# EAGLE board SparkFun_Stepoko_Panel_v10 (EAGLE 7.3.0), part 1 of 5
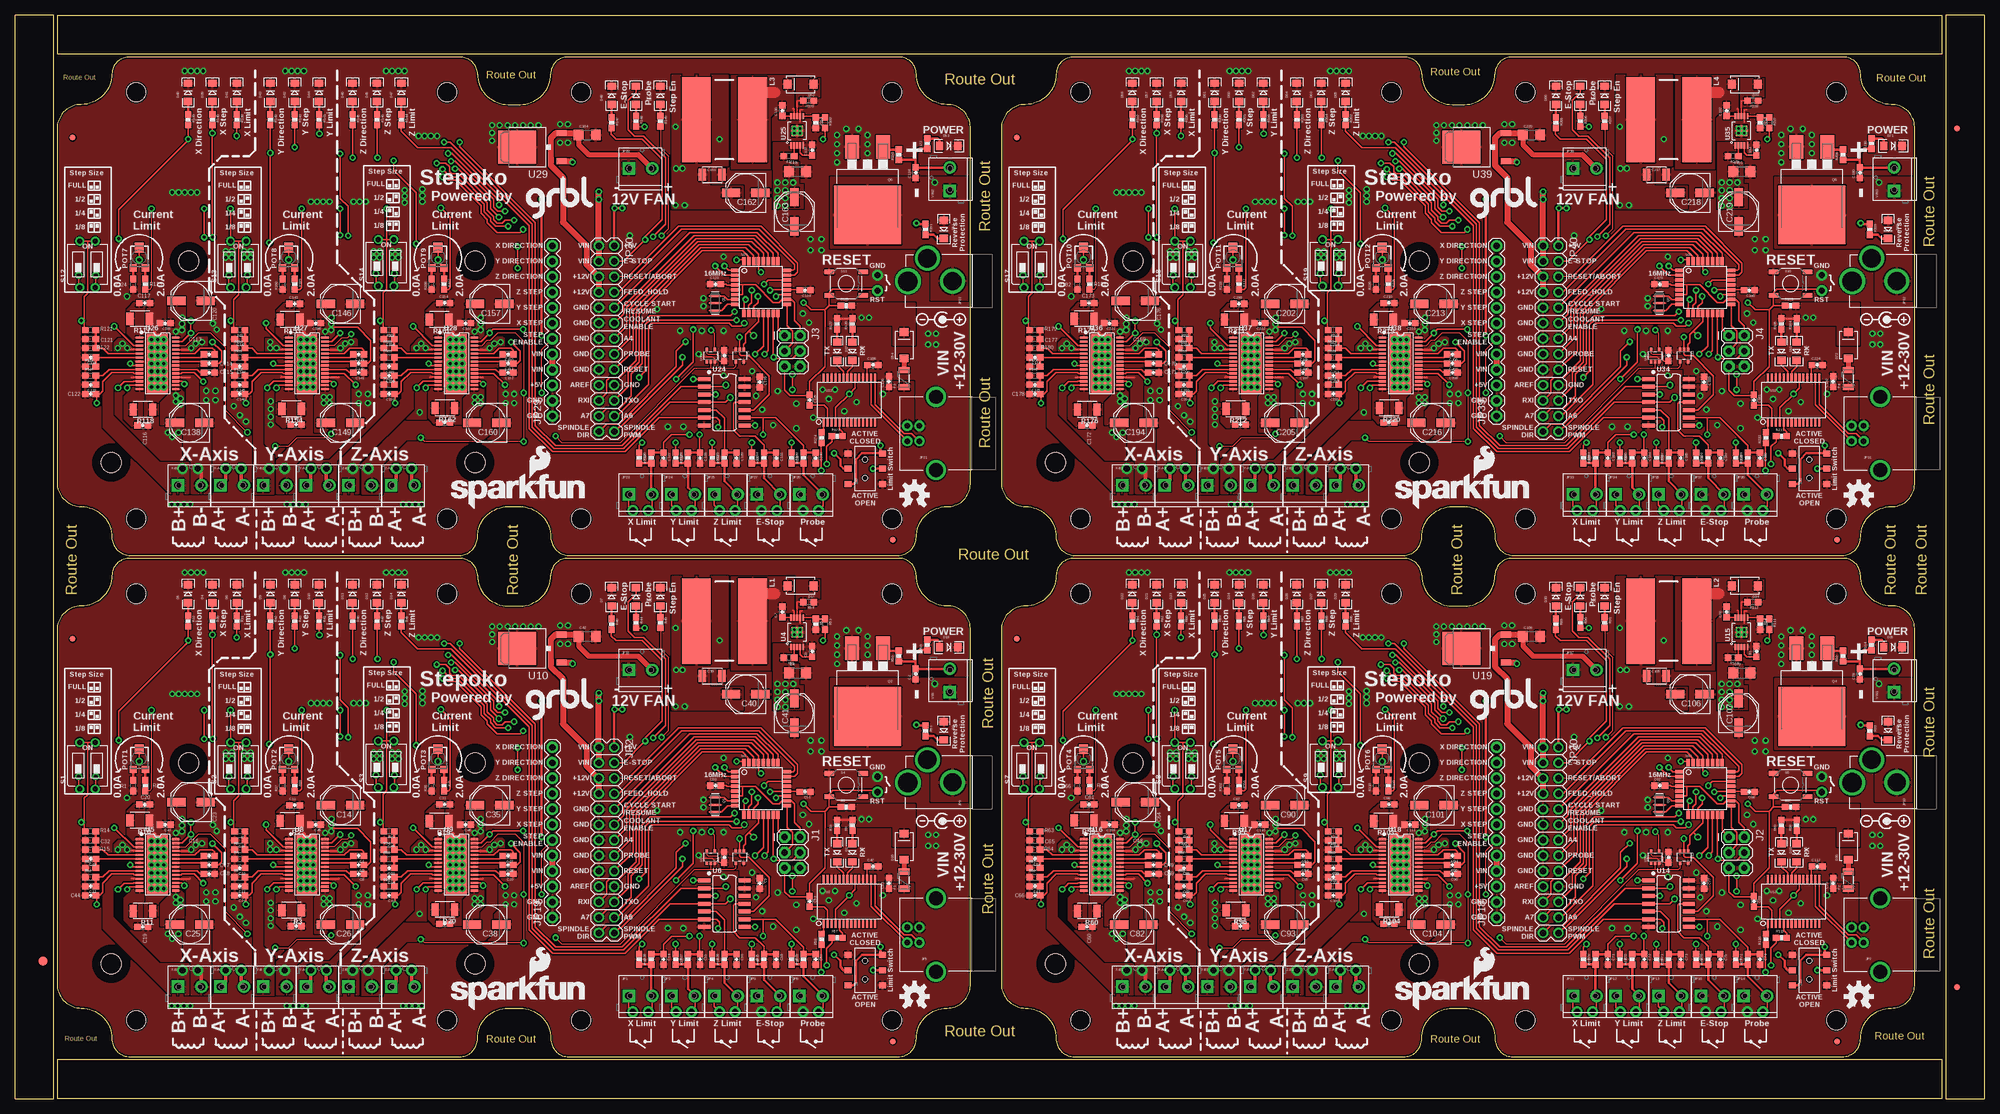
[diagram p0: board, top side]
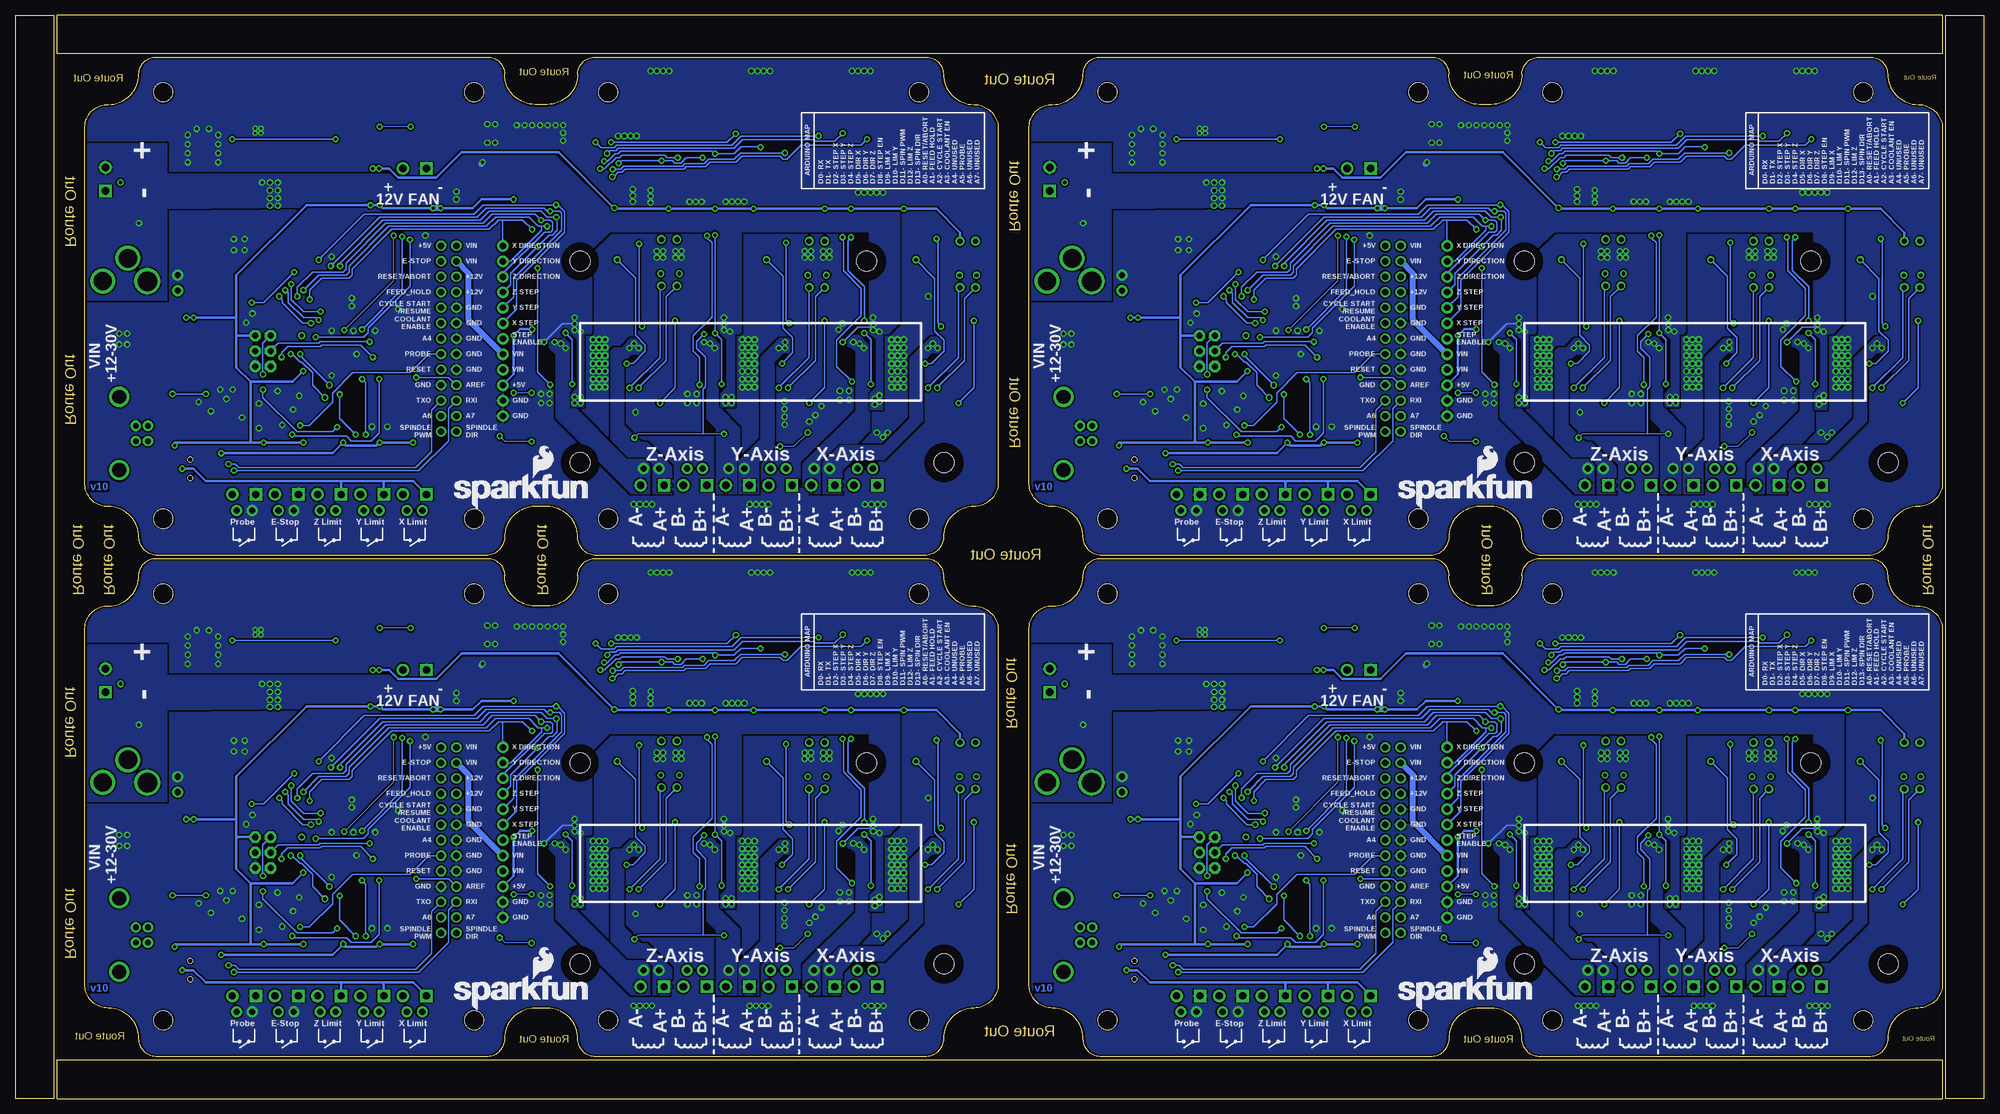
[diagram p1: board, bottom side, seen from below]

Size 323.09 x 177.8 mm. Coordinates in mm from the lower left corner, seen from the top.
Outline: 6.35,0 6.35,177.8 0,177.8 0,0 6.35,0
Outline: 6.86,6.35 6.86,0 316.23,0 316.23,6.35 6.86,6.35
Outline: 316.74,0 323.09,0 323.09,177.8 316.74,177.8 316.74,0
Outline: 316.23,171.45 316.23,177.8 6.86,177.8 6.86,171.45 316.23,171.45
Copper layers (1*16): Top 0.035mm / dielectric 1.5mm / Bottom 0.035mm
Design rules "SparkFun-2-layer": minimum track width 7mil, minimum drill 15mil, track to track 8mil, track to pad 8mil, pad to pad 8mil, via to via 8mil, smd to smd 8mil, copper to edge 8mil, drill to drill 8mil, minimum pad ring 12mil, minimum via ring 10mil, stop-mask expansion 4mil, vias tented up to drill 20mil, thermal gap 10mil
tRestrict: area 13,19.3 to 18.5,24.9; area 72.6,19.3 to 78.2,24.9; area 72.6,52.3 to 78.2,57.9; area 25.7,52.3 to 31.2,57.9; area 167.9,19.3 to 173.5,24.9; area 227.6,19.3 to 233.2,24.9; area 227.6,52.3 to 233.2,57.9; area 180.6,52.3 to 186.2,57.9; area 13,101.6 to 18.5,107.2; area 72.6,101.6 to 78.2,107.2; area 72.6,134.6 to 78.2,140.2; area 25.7,134.6 to 31.2,140.2; 4 more areas; 4 lines
bRestrict: area 25.7,52.3 to 31.2,57.9; area 72.6,19.3 to 78.2,24.9; area 13,19.3 to 18.5,24.9; area 72.8,52.5 to 78.1,57.8; area 180.6,52.3 to 186.2,57.9; area 227.6,19.3 to 233.2,24.9; area 167.9,19.3 to 173.5,24.9; area 227.7,52.5 to 233,57.8; area 25.7,134.6 to 31.2,140.2; area 72.6,101.6 to 78.2,107.2; area 13,101.6 to 18.5,107.2; area 72.8,134.7 to 78.1,140.1; 4 more areas

## Footprints (pad centres in the part's own frame; a part is rotated, then mirrored left to right if it is on the bottom)
0603-CAP = smd 1.1 x 1: 1 -0.85,0; 2 0.85,0
1206 = smd 1.6 x 1.8: 1 -1.4,0; 2 1.4,0
PANASONIC_D = smd 3 x 1.4: + 2.4,0; - -2.4,0
0603 = smd 1.1 x 1: 1 -0.85,0; 2 0.85,0
1210 = smd 1.2 x 2: 1 -1.6,0; 2 1.6,0
LED-1206 = smd 1.2 x 1.4: A -1.5,0; C 1.5,0
SMA-DIODE = smd 1.27 x 1.47: A -2.15,0; C 2.15,0
FIDUCIAL-1.5X3 = smd 1.5 x 1.5: 1 0,0
FIDUCIAL-1X2 = smd 1 x 1: 1 0,0
PTC-1206 = smd 1 x 1.8: 1 -1.4,0; 2 1.4,0
2X3 = drill 1.016 pad 1.88 octagon: 1 0,0; 2 0,2.54; 3 2.54,0; 4 2.54,2.54; 5 5.08,0; 6 5.08,2.54
SCREWTERMINAL-3.5MM-2_LOCK = drill 1.2 pad 2.032 square: 1 -0.178,0 | drill 1.2 pad 2.032: 2 3.678,0
2X13 = drill 1.016 pad 1.651: 1 0,0; 2 0,2.54; 3 2.54,0; 4 2.54,2.54; 5 5.08,0; 6 5.08,2.54; 7 7.62,0; 8 7.62,2.54; 9 10.16,0; 10 10.16,2.54; 11 12.7,0; 12 12.7,2.54; 13 15.24,0; 14 15.24,2.54; 15 17.78,0; 16 17.78,2.54; 17 20.32,0; 18 20.32,2.54; 19 22.86,0; 20 22.86,2.54; 21 25.4,0; 22 25.4,2.54; 23 27.94,0; 24 27.94,2.54; 25 30.48,0; 26 30.48,2.54
USB-B-PTH = drill 0.914 pad 1.676: D+ 0,1.25; D- 1.981,1.25; GND 0,-1.25; VBUS 1.981,-1.25 | drill 2.286: S1 -2.718,-6.02; S2 -2.718,6.02
POWER_JACK_PTH_LOCK = drill 2.997 pad 4.115: GND 0.025,6.557; GNDBREAK 3.762,10.7 | drill 3.2 pad 4.115: PWR 0,13.878
1X12 = drill 1.016 pad 1.88: 1 0,0; 2 2.54,0; 3 5.08,0; 4 7.62,0; 5 10.16,0; 6 12.7,0; 7 15.24,0; 8 17.78,0; 9 20.32,0; 10 22.86,0; 11 25.4,0; 12 27.94,0
INDUCTOR_SDR1307 = smd 14 x 4.75: P$1 0,4.6; P$2 0,-4.6
TC33X = smd 1.2 x 1.2: 1 -1,-1.825; 3 1,-1.825 | smd 1.5 x 1.6: 2 0,1.5
RESONATOR-SMD = smd 0.45 x 1.905: 1 -1.2,0; 2 0,0; 3 1.2,0
TO-263/D2PAK = smd 2.32 x 3.81: 1 -2.54,-7.045; 3 2.54,-7.045 | smd 11 x 9.65: 2 0,4.125
0603-RES = smd 1.1 x 1: 1 -0.85,0; 2 0.85,0
209-2LPST = drill 0.8: 1 -1.27,-3.81; 2 1.27,-3.81; 3 1.27,3.81; 4 -1.27,3.81
TACTILE-SWITCH-SMD = smd 1.524 x 0.762: 1 -2.794,1.905; 2 2.794,1.905; 3 -2.794,-1.905; 4 2.794,-1.905
AYZ0202 = smd 1 x 1.15: 1 -2.5,2.825; 2 0,2.825; 3 2.5,2.825; 4 -2.5,-2.825; 5 0,-2.825; 6 2.5,-2.825 | hole 0.85: 1.5,0; -1.5,0
TQFP32-08@1 = smd 1.27 x 0.559: 1 -4.293,2.8; 2 -4.293,2; 3 -4.293,1.2; 4 -4.293,0.4; 5 -4.293,-0.4; 6 -4.293,-1.2; 7 -4.293,-2; 8 -4.293,-2.8; 17 4.293,-2.8; 18 4.293,-2; 19 4.293,-1.2; 20 4.293,-0.4; 21 4.293,0.4; 22 4.293,1.2; 23 4.293,2; 24 4.293,2.8 | smd 0.559 x 1.27: 9 -2.8,-4.293; 10 -2,-4.293; 11 -1.2,-4.293; 12 -0.4,-4.293; 13 0.4,-4.293; 14 1.2,-4.293; 15 2,-4.293; 16 2.8,-4.293; 25 2.8,4.293; 26 2,4.293; 27 1.2,4.293; 28 0.4,4.293; 29 -0.4,4.293; 30 -1.2,4.293; 31 -2,4.293; 32 -2.8,4.293
SSOP28DB = smd 0.348 x 1.397: 1 -4.225,-3.656; 2 -3.575,-3.656; 3 -2.925,-3.656; 4 -2.275,-3.656; 5 -1.625,-3.656; 6 -0.975,-3.656; 7 -0.325,-3.656; 8 0.325,-3.656; 9 0.975,-3.656; 10 1.625,-3.656; 11 2.275,-3.656; 12 2.925,-3.656; 13 3.575,-3.656; 14 4.225,-3.656; 15 4.225,3.656; 16 3.575,3.656; 17 2.925,3.656; 18 2.275,3.656; 19 1.625,3.656; 20 0.975,3.656; 21 0.325,3.656; 22 -0.325,3.656; 23 -0.975,3.656; 24 -1.625,3.656; 25 -2.275,3.656; 26 -2.925,3.656; 27 -3.575,3.656; 28 -4.225,3.656
SOT353 = smd 0.42 x 0.7: 1 -0.65,-0.95; 2 0,-0.95; 3 0.65,-0.95; 4 0.65,0.95; 5 -0.65,0.95
HVSS0P-10 = smd 0.3 x 1.02: 1 -1,-2.4; 2 -0.5,-2.4; 3 0,-2.4; 4 0.5,-2.4; 5 1,-2.4; 6 1,2.4; 7 0.5,2.4; 8 0,2.4; 9 -0.5,2.4; 10 -1,2.4 | smd 1.905 x 1.727: PAD 0,0
HTSSOP28 = smd 0.36 x 1.19: 1 -4.225,-2.97; 2 -3.575,-2.97; 3 -2.925,-2.97; 4 -2.275,-2.97; 5 -1.625,-2.97; 6 -0.975,-2.97; 7 -0.325,-2.97; 8 0.325,-2.97; 9 0.975,-2.97; 10 1.625,-2.97; 11 2.275,-2.97; 12 2.925,-2.97; 13 3.575,-2.97; 14 4.225,-2.97; 15 4.225,2.97; 16 3.575,2.97; 17 2.925,2.97; 18 2.275,2.97; 19 1.625,2.97; 20 0.975,2.97; 21 0.325,2.97; 22 -0.325,2.97; 23 -0.975,2.97; 24 -1.625,2.97; 25 -2.275,2.97; 26 -2.925,2.97; 27 -3.575,2.97; 28 -4.225,2.97 | drill 0.508: GND@10 -3.9,1; GND@11 -3.9,0; GND@12 -3.9,-1; GND@13 -2.6,-1; GND@14 -2.6,0; GND@15 -2.6,1; GND@16 -1.3,1; GND@17 -1.3,0; GND@18 -1.3,-1; GND@19 0,-1; GND@20 0,0; GND@21 0,1; GND@22 1.3,1; GND@23 1.3,0; GND@24 1.3,-1; GND@25 2.6,-1; GND@26 2.6,0; GND@27 2.6,1; GND@28 3.9,1; GND@29 3.9,0; GND@30 3.9,-1 | smd 9.7 x 3.4: GND@PAD 0,0
SOIC-14 = smd 0.66 x 2.032: 1 -4.445,-3.315; 2 -3.175,-3.315; 3 -1.905,-3.315; 4 -0.635,-3.315; 5 0.635,-3.315; 6 1.905,-3.315; 7 3.175,-3.315; 8 3.175,3.315; 9 1.905,3.315; 10 0.635,3.315; 11 -0.635,3.315; 12 -1.905,3.315; 13 -3.175,3.315; 14 -4.445,3.315
TO-252 = smd 1 x 1.6: 1 -2.28,-4.8; 2 2.28,-4.8 | smd 5.4 x 6.2: 3 0,2.5
FLANGED_RED_ENCLOSURE-DIMENSION-NO-INNER-HOLES = hole 3.175: 64,6; 86,6; 137,6; 13,6; 64,76; 86,76; 137,76; 13,76
STAND-OFF = hole 3.302: 0,0

## Placement (x,y rotation side)
C1  0.22uF  [0603-CAP]  56.36,39.86 180 top
C2  0.1uF  [0603-CAP]  147.75,69.66 90 top
C3  0.1uF  [0603-CAP]  116.33,39.62 90 top
C4  1.0uF  [1206]  128.36,69.86 0 top
C5  0.1uF  [0603-CAP]  122.17,35.31 270 top
C6  0.22uF  [0603-CAP]  56.36,38.36 180 top
C7  0.1uF  [0603-CAP]  125.86,79.86 90 top
C8  0.22uF  [0603-CAP]  56.36,36.86 180 top
C9  10nF  [0603-CAP]  130.76,73.36 90 top
C10  0.1uF  [0603-CAP]  46.1,28.32 0 top
C11  0.1uF  [0603-CAP]  45.85,48.14 0 top
C12  1000pF  [0603-CAP]  36.86,37.86 180 top
C13  1000pF  [0603-CAP]  36.86,34.86 180 top
C14  47uF  [PANASONIC_D]  53.37,48.13 180 top
C15  0.18uF  [0603]  36.86,42.36 180 top
C16  0.22uF  [0603-CAP]  31.86,39.86 180 top
C17  0.22uF  [0603-CAP]  31.86,38.36 180 top
C18  0.22uF  [0603-CAP]  31.86,36.86 180 top
C19  0.1uF  [0603-CAP]  20.95,28.2 0 top
C20  0.1uF  [0603-CAP]  21.21,48.25 0 top
C21  1000pF  [0603-CAP]  12.36,39.36 180 top
C22  1000pF  [0603-CAP]  12.36,34.86 180 top
C23  47uF  [PANASONIC_D]  28.87,48.64 180 top
C24  0.1uF  [0603-CAP]  36.86,33.36 180 top
C25  47uF  [PANASONIC_D]  28.61,28.59 180 top
C26  47uF  [PANASONIC_D]  53.37,28.59 180 top
C27  0.22uF  [0603-CAP]  80.86,39.86 180 top
C28  0.22uF  [0603-CAP]  80.86,38.36 180 top
C29  0.22uF  [0603-CAP]  80.86,36.86 180 top
C30  0.1uF  [0603-CAP]  70.48,28.69 0 top
C31  0.1uF  [0603-CAP]  70.49,48.28 0 top
C32  0.18uF  [0603]  12.36,42.36 180 top
C33  1000pF  [0603-CAP]  61.36,37.86 180 top
C34  1000pF  [0603-CAP]  61.36,36.36 180 top
C35  47uF  [PANASONIC_D]  77.87,48.13 180 top
C36  0.18uF  [0603]  61.36,42.36 180 top
C37  0.1uF  [0603-CAP]  61.36,33.36 180 top
C38  47uF  [PANASONIC_D]  77.36,28.59 180 top
C39  22uF  [1210]  114.36,69.36 0 top
C40  47uF  [PANASONIC_D]  119.86,66.36 180 top
C41  47uF  [PANASONIC_D]  127.86,63.26 90 top
C42  1.0uF  [1206]  93.86,75.86 0 top
C43  0.1uF  [0603-CAP]  24.64,44.96 180 top
C44  0.1uF  [0603-CAP]  12.36,33.36 180 top
C45  0.1uF  [0603-CAP]  49.28,44.96 180 top
C46  0.1uF  [0603-CAP]  73.91,44.96 180 top
C47  0.1uF  [0603-CAP]  140.72,38.1 0 top
C48  0.22uF  [0603-CAP]  186.8,39.86 180 top
C49  0.22uF  [0603-CAP]  186.8,38.36 180 top
C50  0.1uF  [0603-CAP]  114.9,51.36 0 top
C51  0.1uF  [0603-CAP]  129.61,50.36 180 top
C52  0.1uF  [0603-CAP]  130.36,32.36 270 top
C53  0.1uF  [0603-CAP]  143.36,35.36 90 top
C54  0.1uF  [0603-CAP]  106.37,22.86 270 top
C55  0.1uF  [0603-CAP]  112.37,22.86 270 top
C56  0.1uF  [0603-CAP]  118.36,22.86 270 top
C57  0.1uF  [0603-CAP]  131.36,22.86 270 top
C58  0.1uF  [0603-CAP]  124.86,22.86 270 top
C59  0.22uF  [0603-CAP]  186.8,36.86 180 top
C60  0.1uF  [0603-CAP]  175.89,28.2 0 top
C61  0.1uF  [0603-CAP]  176.15,48.25 0 top
C62  1000pF  [0603-CAP]  167.3,39.36 180 top
C63  1000pF  [0603-CAP]  167.3,34.86 180 top
C64  47uF  [PANASONIC_D]  183.81,48.64 180 top
C65  0.18uF  [0603]  167.3,42.36 180 top
C66  0.1uF  [0603-CAP]  167.3,33.36 180 top
C67  0.1uF  [0603-CAP]  269.84,51.36 0 top
C68  0.1uF  [0603-CAP]  284.55,50.36 180 top
C69  0.1uF  [0603-CAP]  285.3,32.36 270 top
C70  0.1uF  [0603-CAP]  298.3,35.36 90 top
C71  0.1uF  [0603-CAP]  261.31,22.86 270 top
C72  0.1uF  [0603-CAP]  267.31,22.86 270 top
C73  0.1uF  [0603-CAP]  273.3,22.86 270 top
C74  0.1uF  [0603-CAP]  286.3,22.86 270 top
C75  0.1uF  [0603-CAP]  279.8,22.86 270 top
C76  0.1uF  [0603-CAP]  271.27,39.62 90 top
C77  0.1uF  [0603-CAP]  277.11,35.31 270 top
C78  0.1uF  [0603-CAP]  302.69,69.66 90 top
C79  1.0uF  [1206]  283.3,69.86 0 top
C80  0.1uF  [0603-CAP]  280.8,79.86 90 top
C81  10nF  [0603-CAP]  285.7,73.36 90 top
C82  47uF  [PANASONIC_D]  183.55,28.59 180 top
C83  0.22uF  [0603-CAP]  211.3,39.86 180 top
C84  0.22uF  [0603-CAP]  211.3,38.36 180 top
C85  0.22uF  [0603-CAP]  211.3,36.86 180 top
C86  0.1uF  [0603-CAP]  201.04,28.32 0 top
C87  0.1uF  [0603-CAP]  200.79,48.14 0 top
C88  1000pF  [0603-CAP]  191.8,37.86 180 top
C89  1000pF  [0603-CAP]  191.8,34.86 180 top
C90  47uF  [PANASONIC_D]  208.31,48.13 180 top
C91  0.18uF  [0603]  191.8,42.36 180 top
C92  0.1uF  [0603-CAP]  191.8,33.36 180 top
C93  47uF  [PANASONIC_D]  208.31,28.59 180 top
C94  0.22uF  [0603-CAP]  235.8,39.86 180 top
C95  0.22uF  [0603-CAP]  235.8,38.36 180 top
C96  0.22uF  [0603-CAP]  235.8,36.86 180 top
C97  0.1uF  [0603-CAP]  225.42,28.69 0 top
C98  0.1uF  [0603-CAP]  225.43,48.28 0 top
C99  1000pF  [0603-CAP]  216.3,37.86 180 top
C100  1000pF  [0603-CAP]  216.3,36.36 180 top
C101  47uF  [PANASONIC_D]  232.81,48.13 180 top
C102  0.18uF  [0603]  216.3,42.36 180 top
C103  0.1uF  [0603-CAP]  216.3,33.36 180 top
C104  47uF  [PANASONIC_D]  232.3,28.59 180 top
C105  22uF  [1210]  269.3,69.36 0 top
C106  47uF  [PANASONIC_D]  274.8,66.36 180 top
C107  47uF  [PANASONIC_D]  282.8,63.26 90 top
C108  1.0uF  [1206]  248.8,75.86 0 top
C109  0.1uF  [0603-CAP]  179.58,44.96 180 top
C110  0.1uF  [0603-CAP]  204.22,44.96 180 top
C111  0.1uF  [0603-CAP]  228.85,44.96 180 top
C112  0.1uF  [0603-CAP]  295.66,38.1 0 top
C113  0.22uF  [0603-CAP]  31.86,122.15 180 top
C114  0.22uF  [0603-CAP]  31.86,120.65 180 top
C115  0.22uF  [0603-CAP]  31.86,119.15 180 top
C116  0.1uF  [0603-CAP]  20.95,110.5 0 top
C117  0.1uF  [0603-CAP]  21.21,130.55 0 top
C118  1000pF  [0603-CAP]  12.36,121.65 180 top
C119  1000pF  [0603-CAP]  12.36,117.15 180 top
C120  47uF  [PANASONIC_D]  28.87,130.93 180 top
C121  0.18uF  [0603]  12.36,124.65 180 top
C122  0.1uF  [0603-CAP]  12.36,115.65 180 top
C123  0.1uF  [0603-CAP]  114.9,133.66 0 top
C124  0.1uF  [0603-CAP]  129.61,132.65 180 top
C125  0.1uF  [0603-CAP]  130.36,114.65 270 top
C126  0.1uF  [0603-CAP]  143.36,117.65 90 top
C127  0.1uF  [0603-CAP]  106.37,105.15 270 top
C128  0.1uF  [0603-CAP]  112.37,105.15 270 top
C129  0.1uF  [0603-CAP]  118.36,105.15 270 top
C130  0.1uF  [0603-CAP]  131.36,105.15 270 top
C131  0.1uF  [0603-CAP]  124.86,105.15 270 top
C132  0.1uF  [0603-CAP]  116.33,121.92 90 top
C133  0.1uF  [0603-CAP]  122.17,117.6 270 top
C134  0.1uF  [0603-CAP]  147.75,151.95 90 top
C135  1.0uF  [1206]  128.36,152.15 0 top
C136  0.1uF  [0603-CAP]  125.86,162.15 90 top
C137  10nF  [0603-CAP]  130.76,155.65 90 top
C138  47uF  [PANASONIC_D]  28.61,110.88 180 top
C139  0.22uF  [0603-CAP]  56.36,122.15 180 top
C140  0.22uF  [0603-CAP]  56.36,120.65 180 top
C141  0.22uF  [0603-CAP]  56.36,119.15 180 top
C142  0.1uF  [0603-CAP]  46.1,110.61 0 top
C143  0.1uF  [0603-CAP]  45.85,130.43 0 top
C144  1000pF  [0603-CAP]  36.86,120.15 180 top
C145  1000pF  [0603-CAP]  36.86,117.15 180 top
C146  47uF  [PANASONIC_D]  53.37,130.42 180 top
C147  0.18uF  [0603]  36.86,124.65 180 top
C148  0.1uF  [0603-CAP]  36.86,115.65 180 top
C149  47uF  [PANASONIC_D]  53.37,110.88 180 top
C150  0.22uF  [0603-CAP]  80.86,122.15 180 top
C151  0.22uF  [0603-CAP]  80.86,120.65 180 top
C152  0.22uF  [0603-CAP]  80.86,119.15 180 top
C153  0.1uF  [0603-CAP]  70.48,110.98 0 top
C154  0.1uF  [0603-CAP]  70.49,130.57 0 top
C155  1000pF  [0603-CAP]  61.36,120.15 180 top
C156  1000pF  [0603-CAP]  61.36,118.65 180 top
C157  47uF  [PANASONIC_D]  77.87,130.42 180 top
C158  0.18uF  [0603]  61.36,124.65 180 top
C159  0.1uF  [0603-CAP]  61.36,115.65 180 top
C160  47uF  [PANASONIC_D]  77.36,110.88 180 top
C161  22uF  [1210]  114.36,151.65 0 top
C162  47uF  [PANASONIC_D]  119.86,148.65 180 top
C163  47uF  [PANASONIC_D]  127.86,145.55 90 top
C164  1.0uF  [1206]  93.86,158.15 0 top
C165  0.1uF  [0603-CAP]  24.64,127.25 180 top
C166  0.1uF  [0603-CAP]  49.28,127.25 180 top
C167  0.1uF  [0603-CAP]  73.91,127.25 180 top
C168  0.1uF  [0603-CAP]  140.72,120.4 0 top
C169  0.22uF  [0603-CAP]  186.8,122.15 180 top
C170  0.22uF  [0603-CAP]  186.8,120.65 180 top
C171  0.22uF  [0603-CAP]  186.8,119.15 180 top
C172  0.1uF  [0603-CAP]  175.89,110.5 0 top
C173  0.1uF  [0603-CAP]  176.15,130.55 0 top
C174  1000pF  [0603-CAP]  167.3,121.65 180 top
C175  1000pF  [0603-CAP]  167.3,117.15 180 top
C176  47uF  [PANASONIC_D]  183.81,130.93 180 top
C177  0.18uF  [0603]  167.3,124.65 180 top
C178  0.1uF  [0603-CAP]  167.3,115.65 180 top
C179  0.1uF  [0603-CAP]  269.84,133.66 0 top
C180  0.1uF  [0603-CAP]  284.55,132.65 180 top
C181  0.1uF  [0603-CAP]  285.3,114.65 270 top
C182  0.1uF  [0603-CAP]  298.3,117.65 90 top
C183  0.1uF  [0603-CAP]  261.31,105.15 270 top
C184  0.1uF  [0603-CAP]  267.31,105.15 270 top
C185  0.1uF  [0603-CAP]  273.3,105.15 270 top
C186  0.1uF  [0603-CAP]  286.3,105.15 270 top
C187  0.1uF  [0603-CAP]  279.8,105.15 270 top
C188  0.1uF  [0603-CAP]  271.27,121.92 90 top
C189  0.1uF  [0603-CAP]  277.11,117.6 270 top
C190  0.1uF  [0603-CAP]  302.69,151.95 90 top
C191  1.0uF  [1206]  283.3,152.15 0 top
C192  0.1uF  [0603-CAP]  280.8,162.15 90 top
C193  10nF  [0603-CAP]  285.7,155.65 90 top
C194  47uF  [PANASONIC_D]  183.55,110.88 180 top
C195  0.22uF  [0603-CAP]  211.3,122.15 180 top
C196  0.22uF  [0603-CAP]  211.3,120.65 180 top
C197  0.22uF  [0603-CAP]  211.3,119.15 180 top
C198  0.1uF  [0603-CAP]  201.04,110.61 0 top
C199  0.1uF  [0603-CAP]  200.79,130.43 0 top
C200  1000pF  [0603-CAP]  191.8,120.15 180 top
C201  1000pF  [0603-CAP]  191.8,117.15 180 top
C202  47uF  [PANASONIC_D]  208.31,130.42 180 top
C203  0.18uF  [0603]  191.8,124.65 180 top
C204  0.1uF  [0603-CAP]  191.8,115.65 180 top
C205  47uF  [PANASONIC_D]  208.31,110.88 180 top
C206  0.22uF  [0603-CAP]  235.8,122.15 180 top
C207  0.22uF  [0603-CAP]  235.8,120.65 180 top
C208  0.22uF  [0603-CAP]  235.8,119.15 180 top
C209  0.1uF  [0603-CAP]  225.42,110.98 0 top
C210  0.1uF  [0603-CAP]  225.43,130.57 0 top
C211  1000pF  [0603-CAP]  216.3,120.15 180 top
C212  1000pF  [0603-CAP]  216.3,118.65 180 top
C213  47uF  [PANASONIC_D]  232.81,130.42 180 top
C214  0.18uF  [0603]  216.3,124.65 180 top
C215  0.1uF  [0603-CAP]  216.3,115.65 180 top
C216  47uF  [PANASONIC_D]  232.3,110.88 180 top
C217  22uF  [1210]  269.3,151.65 0 top
C218  47uF  [PANASONIC_D]  274.8,148.65 180 top
C219  47uF  [PANASONIC_D]  282.8,145.55 90 top
C220  1.0uF  [1206]  248.8,158.15 0 top
C221  0.1uF  [0603-CAP]  179.58,127.25 180 top
C222  0.1uF  [0603-CAP]  204.22,127.25 180 top
C223  0.1uF  [0603-CAP]  228.85,127.25 180 top
C224  0.1uF  [0603-CAP]  295.66,120.4 0 top
D1  RED  [LED-1206]  134.86,40.36 270 top
D2  GREEN  [LED-1206]  137.36,40.36 270 top
D3  RED  [LED-1206]  152.36,60.36 270 top
D4  GREEN  [LED-1206]  32.36,82.86 90 top
D5  RED  [LED-1206]  28.36,82.86 90 top
D6  Yellow  [LED-1206]  36.36,82.86 90 top
D7  RED  [LED-1206]  97.86,82.36 90 top
D8  GREEN  [LED-1206]  45.86,82.86 90 top
D9  RED  [LED-1206]  41.86,82.86 90 top
D10  Yellow  [LED-1206]  49.86,82.86 90 top
D11  BLUE  [LED-1206]  101.86,82.36 90 top
D12  GREEN  [LED-1206]  59.36,82.86 90 top
D13  RED  [LED-1206]  55.36,82.86 90 top
D14  Yellow  [LED-1206]  63.36,82.86 90 top
D15  GREEN  [LED-1206]  105.86,82.36 90 top
D16  MBRA140  [SMA-DIODE]  145.86,41.36 90 top
D17  MBRA140  [SMA-DIODE]  128.86,84.17 180 top
D18  BLUE  [LED-1206]  153.16,74.06 0 top
D19  RED  [LED-1206]  289.8,40.36 270 top
D20  GREEN  [LED-1206]  292.3,40.36 270 top
D21  GREEN  [LED-1206]  187.3,82.86 90 top
D22  RED  [LED-1206]  183.3,82.86 90 top
D23  Yellow  [LED-1206]  191.3,82.86 90 top
D24  GREEN  [LED-1206]  200.8,82.86 90 top
D25  RED  [LED-1206]  196.8,82.86 90 top
D26  Yellow  [LED-1206]  204.8,82.86 90 top
D27  GREEN  [LED-1206]  214.3,82.86 90 top
D28  RED  [LED-1206]  210.3,82.86 90 top
D29  Yellow  [LED-1206]  218.3,82.86 90 top
D30  RED  [LED-1206]  252.8,82.36 90 top
D31  BLUE  [LED-1206]  256.8,82.36 90 top
D32  GREEN  [LED-1206]  260.8,82.36 90 top
D33  RED  [LED-1206]  307.3,60.36 270 top
D34  MBRA140  [SMA-DIODE]  283.8,84.17 180 top
D35  BLUE  [LED-1206]  308.1,74.06 0 top
D36  MBRA140  [SMA-DIODE]  300.8,41.36 90 top
D37  RED  [LED-1206]  134.86,122.65 270 top
D38  GREEN  [LED-1206]  137.36,122.65 270 top
D39  GREEN  [LED-1206]  32.36,165.15 90 top
D40  RED  [LED-1206]  28.36,165.15 90 top
D41  Yellow  [LED-1206]  36.36,165.15 90 top
D42  GREEN  [LED-1206]  45.86,165.15 90 top
D43  RED  [LED-1206]  41.86,165.15 90 top
D44  Yellow  [LED-1206]  49.86,165.15 90 top
D45  GREEN  [LED-1206]  59.36,165.15 90 top
D46  RED  [LED-1206]  55.36,165.15 90 top
D47  Yellow  [LED-1206]  63.36,165.15 90 top
D48  RED  [LED-1206]  97.86,164.65 90 top
D49  BLUE  [LED-1206]  101.86,164.65 90 top
D50  GREEN  [LED-1206]  105.86,164.65 90 top
D51  RED  [LED-1206]  152.36,142.65 270 top
D52  MBRA140  [SMA-DIODE]  128.86,166.46 180 top
D53  BLUE  [LED-1206]  153.16,156.35 0 top
D54  MBRA140  [SMA-DIODE]  145.86,123.65 90 top
D55  RED  [LED-1206]  289.8,122.65 270 top
D56  GREEN  [LED-1206]  292.3,122.65 270 top
D57  GREEN  [LED-1206]  187.3,165.15 90 top
D58  RED  [LED-1206]  183.3,165.15 90 top
D59  Yellow  [LED-1206]  191.3,165.15 90 top
D60  GREEN  [LED-1206]  200.8,165.15 90 top
D61  RED  [LED-1206]  196.8,165.15 90 top
D62  Yellow  [LED-1206]  204.8,165.15 90 top
D63  GREEN  [LED-1206]  214.3,165.15 90 top
D64  RED  [LED-1206]  210.3,165.15 90 top
D65  Yellow  [LED-1206]  218.3,165.15 90 top
D66  RED  [LED-1206]  252.8,164.65 90 top
D67  BLUE  [LED-1206]  256.8,164.65 90 top
D68  GREEN  [LED-1206]  260.8,164.65 90 top
D69  RED  [LED-1206]  307.3,142.65 270 top
D70  MBRA140  [SMA-DIODE]  283.8,166.46 180 top
D71  BLUE  [LED-1206]  308.1,156.35 0 top
D72  MBRA140  [SMA-DIODE]  300.8,123.65 90 top
E$1  [FIDUCIAL-1.5X3]  4.57,22.61 0 top
E$4  [FIDUCIAL-1X2]  318.64,18.29 0 top
E$5  [FIDUCIAL-1X2]  318.64,159.26 180 top
F1  PTCSMD  [PTC-1206]  145.86,35.86 90 top
F2  PTCSMD  [PTC-1206]  300.8,35.86 90 top
F3  PTCSMD  [PTC-1206]  145.86,118.15 90 top
F4  PTCSMD  [PTC-1206]  300.8,118.15 90 top
FID1  FIDUCIAL1X2  [FIDUCIAL-1X2]  9.4,75.44 0 top
FID2  FIDUCIAL1X2  [FIDUCIAL-1X2]  144.02,9.4 0 top
FID3  FIDUCIAL1X2  [FIDUCIAL-1X2]  164.34,75.44 0 top
FID4  FIDUCIAL1X2  [FIDUCIAL-1X2]  298.96,9.4 0 top
FID5  FIDUCIAL1X2  [FIDUCIAL-1X2]  9.4,157.73 0 top
FID6  FIDUCIAL1X2  [FIDUCIAL-1X2]  144.02,91.69 0 top
FID7  FIDUCIAL1X2  [FIDUCIAL-1X2]  164.34,157.73 0 top
FID8  FIDUCIAL1X2  [FIDUCIAL-1X2]  298.96,91.69 0 top
J1  AVR ISP  [2X3]  126.24,42.93 270 top
J2  AVR ISP  [2X3]  281.18,42.93 270 top
J3  AVR ISP  [2X3]  126.24,125.22 270 top
J4  AVR ISP  [2X3]  281.18,125.22 270 top
JP1  3.5mm  [SCREWTERMINAL-3.5MM-2_LOCK]  100.86,16.86 0 top
JP2  [2X13]  95.76,57.66 270 top
JP3  3.5mm  [SCREWTERMINAL-3.5MM-2_LOCK]  107.86,16.86 0 top
JP4  3.5mm  [SCREWTERMINAL-3.5MM-2_LOCK]  114.86,16.86 0 top
JP5  USB-B  [USB-B-PTH]  148.36,26.86 180 top
JP6  POWER  [POWER_JACK_PTH_LOCK]  160.36,51.86 90 top
JP7  USB-B  [USB-B-PTH]  303.3,26.86 180 top
JP8  3.5mm  [SCREWTERMINAL-3.5MM-2_LOCK]  128.86,16.86 0 top
JP9  3.5mm  [SCREWTERMINAL-3.5MM-2_LOCK]  121.86,16.86 0 top
JP10  POWER  [POWER_JACK_PTH_LOCK]  315.3,51.86 90 top
JP11  3.5mm  [SCREWTERMINAL-3.5MM-2_LOCK]  255.8,16.86 0 top
JP12  3.5mm  [SCREWTERMINAL-3.5MM-2_LOCK]  262.8,16.86 0 top
JP13  3.5mm  [SCREWTERMINAL-3.5MM-2_LOCK]  269.8,16.86 0 top
JP14  3.5mm  [SCREWTERMINAL-3.5MM-2_LOCK]  283.8,16.86 0 top
JP15  3.5mm  [SCREWTERMINAL-3.5MM-2_LOCK]  100.84,70.36 0 top
JP16  3.5mm  [SCREWTERMINAL-3.5MM-2_LOCK]  276.8,16.86 0 top
JP17  3.5mm  [SCREWTERMINAL-3.5MM-2_LOCK]  255.78,70.36 0 top
JP18  [1X12]  243.08,29.72 90 top
JP19  [1X12]  88.14,29.72 90 top
JP20  [2X13]  250.7,57.66 270 top
JP21  USB-B  [USB-B-PTH]  148.36,109.15 180 top
JP22  POWER  [POWER_JACK_PTH_LOCK]  160.36,134.15 90 top
JP23  3.5mm  [SCREWTERMINAL-3.5MM-2_LOCK]  100.86,99.15 0 top
JP24  3.5mm  [SCREWTERMINAL-3.5MM-2_LOCK]  107.86,99.15 0 top
JP25  3.5mm  [SCREWTERMINAL-3.5MM-2_LOCK]  114.86,99.15 0 top
JP26  3.5mm  [SCREWTERMINAL-3.5MM-2_LOCK]  128.86,99.15 0 top
JP27  3.5mm  [SCREWTERMINAL-3.5MM-2_LOCK]  121.86,99.15 0 top
JP28  3.5mm  [SCREWTERMINAL-3.5MM-2_LOCK]  100.84,152.65 0 top
JP29  [1X12]  88.14,112.01 90 top
JP30  [2X13]  95.76,139.95 270 top
JP31  USB-B  [USB-B-PTH]  303.3,109.15 180 top
JP32  POWER  [POWER_JACK_PTH_LOCK]  315.3,134.15 90 top
JP33  3.5mm  [SCREWTERMINAL-3.5MM-2_LOCK]  255.8,99.15 0 top
JP34  3.5mm  [SCREWTERMINAL-3.5MM-2_LOCK]  262.8,99.15 0 top
JP35  3.5mm  [SCREWTERMINAL-3.5MM-2_LOCK]  269.8,99.15 0 top
JP36  3.5mm  [SCREWTERMINAL-3.5MM-2_LOCK]  283.8,99.15 0 top
JP37  3.5mm  [SCREWTERMINAL-3.5MM-2_LOCK]  276.8,99.15 0 top
JP38  3.5mm  [SCREWTERMINAL-3.5MM-2_LOCK]  255.78,152.65 0 top
JP39  [1X12]  243.08,112.01 90 top
JP40  [2X13]  250.7,139.95 270 top
L1  27uH  [INDUCTOR_SDR1307]  116.36,78.36 270 top
L2  27uH  [INDUCTOR_SDR1307]  271.3,78.36 270 top
L3  27uH  [INDUCTOR_SDR1307]  116.36,160.65 270 top
L4  27uH  [INDUCTOR_SDR1307]  271.3,160.65 270 top
LOGO1  OSHW-LOGOM  [OSHW-LOGO-M]  147.57,16.76 0 top
LOGO2  SFE_LOGO_NAME_FLAME.2_INCH  [SFE_LOGO_NAME_FLAME_.2@1]  70.87,14.48 0 top
LOGO3  SFE_LOGO_NAME_FLAME.2_INCH  [SFE_LOGO_NAME_FLAME_.2]  96.77,14.48 0 bottom
LOGO4  OSHW-LOGOM  [OSHW-LOGO-M]  302.51,16.76 0 top
LOGO5  SFE_LOGO_NAME_FLAME.2_INCH  [SFE_LOGO_NAME_FLAME_.2@1]  225.81,14.48 0 top
LOGO6  SFE_LOGO_NAME_FLAME.2_INCH  [SFE_LOGO_NAME_FLAME_.2]  251.71,14.48 0 bottom
LOGO7  OSHW-LOGOM  [OSHW-LOGO-M]  147.57,99.06 0 top
LOGO8  SFE_LOGO_NAME_FLAME.2_INCH  [SFE_LOGO_NAME_FLAME_.2@1]  70.87,96.77 0 top
LOGO9  SFE_LOGO_NAME_FLAME.2_INCH  [SFE_LOGO_NAME_FLAME_.2]  96.77,96.77 0 bottom
LOGO10  OSHW-LOGOM  [OSHW-LOGO-M]  302.51,99.06 0 top
LOGO11  SFE_LOGO_NAME_FLAME.2_INCH  [SFE_LOGO_NAME_FLAME_.2@1]  225.81,96.77 0 top
LOGO12  SFE_LOGO_NAME_FLAME.2_INCH  [SFE_LOGO_NAME_FLAME_.2]  251.71,96.77 0 bottom
POT1  2K_LINEAR_POT_SMD  [TC33X]  20.36,55.86 0 top
POT2  2K_LINEAR_POT_SMD  [TC33X]  44.86,55.86 0 top
POT3  2K_LINEAR_POT_SMD  [TC33X]  69.36,55.86 0 top
POT4  2K_LINEAR_POT_SMD  [TC33X]  175.3,55.86 0 top
POT5  2K_LINEAR_POT_SMD  [TC33X]  199.8,55.86 0 top
POT6  2K_LINEAR_POT_SMD  [TC33X]  224.3,55.86 0 top
POT7  2K_LINEAR_POT_SMD  [TC33X]  20.36,138.15 0 top
POT8  2K_LINEAR_POT_SMD  [TC33X]  44.86,138.15 0 top
POT9  2K_LINEAR_POT_SMD  [TC33X]  69.36,138.15 0 top
POT10  2K_LINEAR_POT_SMD  [TC33X]  175.3,138.15 0 top
POT11  2K_LINEAR_POT_SMD  [TC33X]  199.8,138.15 0 top
POT12  2K_LINEAR_POT_SMD  [TC33X]  224.3,138.15 0 top
Q1  16MHZ  [RESONATOR-SMD]  114.86,48.23 270 top
Q2  100A/100V  [TO-263/D2PAK]  139.86,66.86 180 top
Q3  16MHZ  [RESONATOR-SMD]  269.8,48.23 270 top
Q4  100A/100V  [TO-263/D2PAK]  294.8,66.86 180 top
Q5  16MHZ  [RESONATOR-SMD]  114.86,130.53 270 top
Q6  100A/100V  [TO-263/D2PAK]  139.86,149.15 180 top
Q7  16MHZ  [RESONATOR-SMD]  269.8,130.53 270 top
Q8  100A/100V  [TO-263/D2PAK]  294.8,149.15 180 top
R1  0  [0603]  19.36,51.36 90 top
R2  0.1  [1210]  45.09,45.56 180 top
R3  0.1  [1210]  45.34,30.9 180 top
R4  39K  [0603]  36.86,39.36 0 top
R5  39K  [0603]  36.86,36.36 0 top
R6  10K  [0603-RES]  136.36,47.86 0 top
R7  5.6K  [0603]  36.86,43.86 180 top
R8  5.6K  [0603]  36.86,40.86 0 top
R9  1K  [0603-RES]  137.36,44.86 90 top
R10  0.1  [1210]  20.45,45.67 180 top
R11  0.1  [1210]  20.96,30.78 180 top
R12  39K  [0603]  12.36,37.86 0 top
R13  39K  [0603]  12.36,36.36 0 top
R14  5.6K  [0603]  12.36,43.86 180 top
R15  5.6K  [0603]  12.36,40.86 0 top
R16  3.3K  [0603-RES]  45.86,51.36 270 top
R17  0  [0603]  43.86,51.36 90 top
R18  1K  [0603-RES]  134.86,44.86 90 top
R19  0.1  [1210]  69.57,45.54 180 top
R20  0.1  [1210]  70.49,31.01 180 top
R21  39K  [0603]  61.36,39.36 0 top
R22  39K  [0603]  61.36,34.86 0 top
R23  5.6K  [0603]  61.36,43.86 180 top
R24  5.6K  [0603]  61.36,40.86 0 top
R25  3.3K  [0603-RES]  70.36,51.36 270 top
R26  0  [0603]  68.36,51.36 90 top
R27  10K  [0603-RES]  108.37,22.86 270 top
R28  10K  [0603-RES]  114.36,22.86 270 top
R29  10K  [0603-RES]  127.36,22.86 270 top
R30  1K  [0603-RES]  104.37,22.86 90 top
R31  1K  [0603-RES]  36.36,78.36 270 top
R32  1K  [0603-RES]  28.36,78.36 270 top
R33  1K  [0603-RES]  110.37,22.86 90 top
R34  1K  [0603-RES]  116.36,22.86 90 top
R35  10K  [0603-RES]  120.86,22.86 270 top
R36  1K  [0603-RES]  129.36,22.86 90 top
R37  3.3K  [0603-RES]  21.36,51.36 270 top
R38  10K  [0603-RES]  102.37,22.86 270 top
R39  1K  [0603-RES]  32.36,78.36 270 top
R40  1K  [0603-RES]  97.86,77.86 270 top
R41  1K  [0603-RES]  49.86,78.36 270 top
R42  1K  [0603-RES]  41.86,78.36 270 top
R43  1K  [0603-RES]  45.86,78.36 270 top
R44  1K  [0603-RES]  101.86,78.11 270 top
R45  1K  [0603-RES]  63.36,78.36 270 top
R46  1K  [0603-RES]  55.36,78.36 270 top
R47  1K  [0603-RES]  59.36,78.36 270 top
R48  1K  [0603-RES]  122.86,22.86 90 top
R49  1K  [0603-RES]  105.86,78.11 270 top
R50  1K  [0603-RES]  144.98,72.63 90 top
R51  10K  [0603-RES]  149.36,60.36 270 top
R52  10K  [0603-RES]  131.36,77.86 270 top
R53  9.76K  [0603]  132.86,77.86 270 top
R54  50.0m  [0603]  130.16,81.47 180 top
R55  348K  [0603]  126.96,72.36 180 top
R56  10K  [0603-RES]  149.66,74.46 90 top
R57  1K  [0603-RES]  134.87,26.42 0 top
R58  1K  [0603-RES]  132.33,26.16 90 top
R59  0.1  [1210]  175.39,45.67 180 top
R60  0.1  [1210]  175.9,30.78 180 top
R61  39K  [0603]  167.3,37.86 0 top
R62  39K  [0603]  167.3,36.36 0 top
R63  5.6K  [0603]  167.3,43.86 180 top
R64  5.6K  [0603]  167.3,40.86 0 top
R65  3.3K  [0603-RES]  176.3,51.36 270 top
R66  0  [0603]  174.3,51.36 90 top
R67  10K  [0603-RES]  291.3,47.86 0 top
R68  1K  [0603-RES]  292.3,44.86 90 top
R69  1K  [0603-RES]  289.8,44.86 90 top
R70  10K  [0603-RES]  263.31,22.86 270 top
R71  10K  [0603-RES]  269.3,22.86 270 top
R72  10K  [0603-RES]  282.3,22.86 270 top
R73  1K  [0603-RES]  259.31,22.86 90 top
R74  1K  [0603-RES]  265.31,22.86 90 top
R75  1K  [0603-RES]  271.3,22.86 90 top
R76  10K  [0603-RES]  275.8,22.86 270 top
R77  1K  [0603-RES]  284.3,22.86 90 top
R78  10K  [0603-RES]  257.31,22.86 270 top
R79  1K  [0603-RES]  277.8,22.86 90 top
R80  1K  [0603-RES]  191.3,78.36 270 top
R81  1K  [0603-RES]  183.3,78.36 270 top
R82  1K  [0603-RES]  187.3,78.36 270 top
R83  1K  [0603-RES]  204.8,78.36 270 top
R84  1K  [0603-RES]  196.8,78.36 270 top
R85  1K  [0603-RES]  200.8,78.36 270 top
R86  1K  [0603-RES]  218.3,78.36 270 top
R87  1K  [0603-RES]  210.3,78.36 270 top
R88  1K  [0603-RES]  214.3,78.36 270 top
R89  1K  [0603-RES]  252.8,77.86 270 top
R90  1K  [0603-RES]  256.8,78.11 270 top
R91  1K  [0603-RES]  260.8,78.11 270 top
R92  1K  [0603-RES]  299.92,72.63 90 top
R93  10K  [0603-RES]  304.3,60.36 270 top
R94  10K  [0603-RES]  286.3,77.86 270 top
R95  0.1  [1210]  200.03,45.56 180 top
R96  0.1  [1210]  200.28,30.9 180 top
R97  39K  [0603]  191.8,39.36 0 top
R98  39K  [0603]  191.8,36.36 0 top
R99  5.6K  [0603]  191.8,43.86 180 top
R100  5.6K  [0603]  191.8,40.86 0 top
R101  3.3K  [0603-RES]  200.8,51.36 270 top
R102  0  [0603]  198.8,51.36 90 top
R103  0.1  [1210]  224.51,45.54 180 top
R104  0.1  [1210]  225.43,31.01 180 top
R105  39K  [0603]  216.3,39.36 0 top
R106  39K  [0603]  216.3,34.86 0 top
R107  5.6K  [0603]  216.3,43.86 180 top
R108  5.6K  [0603]  216.3,40.86 0 top
R109  3.3K  [0603-RES]  225.3,51.36 270 top
R110  0  [0603]  223.3,51.36 90 top
R111  9.76K  [0603]  287.8,77.86 270 top
R112  50.0m  [0603]  285.1,81.47 180 top
R113  348K  [0603]  281.9,72.36 180 top
R114  10K  [0603-RES]  304.6,74.46 90 top
R115  1K  [0603-RES]  289.81,26.42 0 top
R116  1K  [0603-RES]  287.27,26.16 90 top
R117  0.1  [1210]  20.45,127.97 180 top
R118  0.1  [1210]  20.96,113.08 180 top
R119  39K  [0603]  12.36,120.15 0 top
R120  39K  [0603]  12.36,118.65 0 top
R121  5.6K  [0603]  12.36,126.15 180 top
R122  5.6K  [0603]  12.36,123.15 0 top
R123  3.3K  [0603-RES]  21.36,133.65 270 top
R124  0  [0603]  19.36,133.65 90 top
R125  10K  [0603-RES]  136.36,130.15 0 top
R126  1K  [0603-RES]  137.36,127.15 90 top
R127  1K  [0603-RES]  134.86,127.15 90 top
R128  10K  [0603-RES]  108.37,105.15 270 top
R129  10K  [0603-RES]  114.36,105.15 270 top
R130  10K  [0603-RES]  127.36,105.15 270 top
R131  1K  [0603-RES]  104.37,105.15 90 top
R132  1K  [0603-RES]  110.37,105.15 90 top
R133  1K  [0603-RES]  116.36,105.15 90 top
R134  10K  [0603-RES]  120.86,105.15 270 top
R135  1K  [0603-RES]  129.36,105.15 90 top
R136  10K  [0603-RES]  102.37,105.15 270 top
R137  1K  [0603-RES]  122.86,105.15 90 top
R138  1K  [0603-RES]  36.36,160.65 270 top
R139  1K  [0603-RES]  28.36,160.65 270 top
R140  1K  [0603-RES]  32.36,160.65 270 top
R141  1K  [0603-RES]  49.86,160.65 270 top
R142  1K  [0603-RES]  41.86,160.65 270 top
R143  1K  [0603-RES]  45.86,160.65 270 top
R144  1K  [0603-RES]  63.36,160.65 270 top
R145  1K  [0603-RES]  55.36,160.65 270 top
R146  1K  [0603-RES]  59.36,160.65 270 top
R147  1K  [0603-RES]  97.86,160.15 270 top
R148  1K  [0603-RES]  101.86,160.41 270 top
R149  1K  [0603-RES]  105.86,160.41 270 top
R150  1K  [0603-RES]  144.98,154.92 90 top
R151  10K  [0603-RES]  149.36,142.65 270 top
R152  10K  [0603-RES]  131.36,160.15 270 top
R153  0.1  [1210]  45.09,127.85 180 top
R154  0.1  [1210]  45.34,113.19 180 top
R155  39K  [0603]  36.86,121.65 0 top
R156  39K  [0603]  36.86,118.65 0 top
R157  5.6K  [0603]  36.86,126.15 180 top
R158  5.6K  [0603]  36.86,123.15 0 top
R159  3.3K  [0603-RES]  45.86,133.65 270 top
R160  0  [0603]  43.86,133.65 90 top
R161  0.1  [1210]  69.57,127.84 180 top
R162  0.1  [1210]  70.49,113.31 180 top
R163  39K  [0603]  61.36,121.65 0 top
R164  39K  [0603]  61.36,117.15 0 top
R165  5.6K  [0603]  61.36,126.15 180 top
R166  5.6K  [0603]  61.36,123.15 0 top
R167  3.3K  [0603-RES]  70.36,133.65 270 top
R168  0  [0603]  68.36,133.65 90 top
R169  9.76K  [0603]  132.86,160.15 270 top
R170  50.0m  [0603]  130.16,163.76 180 top
R171  348K  [0603]  126.96,154.65 180 top
R172  10K  [0603-RES]  149.66,156.75 90 top
R173  1K  [0603-RES]  134.87,108.71 0 top
R174  1K  [0603-RES]  132.33,108.46 90 top
R175  0.1  [1210]  175.39,127.97 180 top
R176  0.1  [1210]  175.9,113.08 180 top
R177  39K  [0603]  167.3,120.15 0 top
R178  39K  [0603]  167.3,118.65 0 top
R179  5.6K  [0603]  167.3,126.15 180 top
R180  5.6K  [0603]  167.3,123.15 0 top
R181  3.3K  [0603-RES]  176.3,133.65 270 top
R182  0  [0603]  174.3,133.65 90 top
R183  10K  [0603-RES]  291.3,130.15 0 top
R184  1K  [0603-RES]  292.3,127.15 90 top
R185  1K  [0603-RES]  289.8,127.15 90 top
R186  10K  [0603-RES]  263.31,105.15 270 top
R187  10K  [0603-RES]  269.3,105.15 270 top
R188  10K  [0603-RES]  282.3,105.15 270 top
R189  1K  [0603-RES]  259.31,105.15 90 top
R190  1K  [0603-RES]  265.31,105.15 90 top
R191  1K  [0603-RES]  271.3,105.15 90 top
R192  10K  [0603-RES]  275.8,105.15 270 top
R193  1K  [0603-RES]  284.3,105.15 90 top
R194  10K  [0603-RES]  257.31,105.15 270 top
R195  1K  [0603-RES]  277.8,105.15 90 top
R196  1K  [0603-RES]  191.3,160.65 270 top
R197  1K  [0603-RES]  183.3,160.65 270 top
R198  1K  [0603-RES]  187.3,160.65 270 top
R199  1K  [0603-RES]  204.8,160.65 270 top
R200  1K  [0603-RES]  196.8,160.65 270 top
R201  1K  [0603-RES]  200.8,160.65 270 top
R202  1K  [0603-RES]  218.3,160.65 270 top
R203  1K  [0603-RES]  210.3,160.65 270 top
R204  1K  [0603-RES]  214.3,160.65 270 top
R205  1K  [0603-RES]  252.8,160.15 270 top
R206  1K  [0603-RES]  256.8,160.41 270 top
R207  1K  [0603-RES]  260.8,160.41 270 top
R208  1K  [0603-RES]  299.92,154.92 90 top
R209  10K  [0603-RES]  304.3,142.65 270 top
R210  10K  [0603-RES]  286.3,160.15 270 top
R211  0.1  [1210]  200.03,127.85 180 top
R212  0.1  [1210]  200.28,113.19 180 top
R213  39K  [0603]  191.8,121.65 0 top
R214  39K  [0603]  191.8,118.65 0 top
R215  5.6K  [0603]  191.8,126.15 180 top
R216  5.6K  [0603]  191.8,123.15 0 top
R217  3.3K  [0603-RES]  200.8,133.65 270 top
R218  0  [0603]  198.8,133.65 90 top
R219  0.1  [1210]  224.51,127.84 180 top
R220  0.1  [1210]  225.43,113.31 180 top
R221  39K  [0603]  216.3,121.65 0 top
R222  39K  [0603]  216.3,117.15 0 top
R223  5.6K  [0603]  216.3,126.15 180 top
R224  5.6K  [0603]  216.3,123.15 0 top
R225  3.3K  [0603-RES]  225.3,133.65 270 top
R226  0  [0603]  223.3,133.65 90 top
R227  9.76K  [0603]  287.8,160.15 270 top
R228  50.0m  [0603]  285.1,163.76 180 top
R229  348K  [0603]  281.9,154.65 180 top
R230  10K  [0603-RES]  304.6,156.75 90 top
R231  1K  [0603-RES]  289.81,108.71 0 top
R232  1K  [0603-RES]  287.27,108.46 90 top
S1  2-POS-DIPCTS-THRU-HOLE  [209-2LPST]  11.85,54.62 0 top
S2  2-POS-DIPCTS-THRU-HOLE  [209-2LPST]  36.6,54.62 0 top
S3  2-POS-DIPCTS-THRU-HOLE  [209-2LPST]  60.85,54.87 0 top
S4  Reset  [TACTILE-SWITCH-SMD]  136.36,51.46 0 top
S5  DPDT  [AYZ0202]  139.45,21.08 90 top
S6  Reset  [TACTILE-SWITCH-SMD]  291.3,51.46 0 top
S7  2-POS-DIPCTS-THRU-HOLE  [209-2LPST]  166.79,54.62 0 top
S8  2-POS-DIPCTS-THRU-HOLE  [209-2LPST]  191.54,54.62 0 top
S9  2-POS-DIPCTS-THRU-HOLE  [209-2LPST]  215.79,54.87 0 top
S10  DPDT  [AYZ0202]  294.39,21.08 90 top
S11  Reset  [TACTILE-SWITCH-SMD]  136.36,133.75 0 top
S12  2-POS-DIPCTS-THRU-HOLE  [209-2LPST]  11.85,136.92 0 top
S13  2-POS-DIPCTS-THRU-HOLE  [209-2LPST]  36.6,136.92 0 top
S14  2-POS-DIPCTS-THRU-HOLE  [209-2LPST]  60.85,137.17 0 top
S15  DPDT  [AYZ0202]  139.45,103.38 90 top
S16  Reset  [TACTILE-SWITCH-SMD]  291.3,133.75 0 top
S17  2-POS-DIPCTS-THRU-HOLE  [209-2LPST]  166.79,136.92 0 top
S18  2-POS-DIPCTS-THRU-HOLE  [209-2LPST]  191.54,136.92 0 top
S19  2-POS-DIPCTS-THRU-HOLE  [209-2LPST]  215.79,137.17 0 top
S20  DPDT  [AYZ0202]  294.39,103.38 90 top
U1  ATMEGA328  [TQFP32-08@1]  122.36,50.86 0 top
U2  FT232RLSSOP  [SSOP28DB]  136.86,32.36 0 top
U3  74LVC1G04  [SOT353]  114.11,39.62 0 top
U4  LM25011  [HVSS0P-10]  128.3,76.54 0 top
U5  DRV8811  [HTSSOP28]  23.36,38.36 270 top
U6  74HC7014D  [SOIC-14]  116.36,31.36 270 top
U7  7432SE  [SOT353]  118.87,39.62 180 top
U8  DRV8811  [HTSSOP28]  47.86,38.36 270 top
U9  DRV8811  [HTSSOP28]  72.36,38.36 270 top
U10  +12v  [TO-252]  84.86,73.86 90 top
U11  ATMEGA328  [TQFP32-08@1]  277.3,50.86 0 top
U12  FT232RLSSOP  [SSOP28DB]  291.8,32.36 0 top
U13  7432SE  [SOT353]  273.81,39.62 180 top
U14  74HC7014D  [SOIC-14]  271.3,31.36 270 top
U15  LM25011  [HVSS0P-10]  283.24,76.54 0 top
U16  DRV8811  [HTSSOP28]  178.3,38.36 270 top
U17  DRV8811  [HTSSOP28]  202.8,38.36 270 top
U18  DRV8811  [HTSSOP28]  227.3,38.36 270 top
U19  +12v  [TO-252]  239.8,73.86 90 top
U20  74LVC1G04  [SOT353]  269.05,39.62 0 top
U21  ATMEGA328  [TQFP32-08@1]  122.36,133.15 0 top
U22  FT232RLSSOP  [SSOP28DB]  136.86,114.65 0 top
U23  7432SE  [SOT353]  118.87,121.92 180 top
U24  74HC7014D  [SOIC-14]  116.36,113.65 270 top
U25  LM25011  [HVSS0P-10]  128.3,158.83 0 top
U26  DRV8811  [HTSSOP28]  23.36,120.65 270 top
U27  DRV8811  [HTSSOP28]  47.86,120.65 270 top
U28  DRV8811  [HTSSOP28]  72.36,120.65 270 top
U29  +12v  [TO-252]  84.86,156.15 90 top
U30  74LVC1G04  [SOT353]  114.11,121.92 0 top
U31  ATMEGA328  [TQFP32-08@1]  277.3,133.15 0 top
U32  FT232RLSSOP  [SSOP28DB]  291.8,114.65 0 top
U33  7432SE  [SOT353]  273.81,121.92 180 top
U34  74HC7014D  [SOIC-14]  271.3,113.65 270 top
U35  LM25011  [HVSS0P-10]  283.24,158.83 0 top
U36  DRV8811  [HTSSOP28]  178.3,120.65 270 top
U37  DRV8811  [HTSSOP28]  202.8,120.65 270 top
U38  DRV8811  [HTSSOP28]  227.3,120.65 270 top
U39  +12v  [TO-252]  239.8,156.15 90 top
U40  74LVC1G04  [SOT353]  269.05,121.92 0 top
U$1  [FLANGED_RED_ENCLOSURE-DIMENSION-NO-INNER-HOLES]  6.86,6.86 0 top
U$2  [STAND-OFF]  75.44,55.12 0 top
U$3  [STAND-OFF]  75.44,22.1 0 top
U$4  [STAND-OFF]  28.45,55.12 0 top
U$5  [STAND-OFF]  15.75,22.1 0 top
U$6  [FLANGED_RED_ENCLOSURE-DIMENSION-NO-INNER-HOLES]  161.8,6.86 0 top
U$7  [STAND-OFF]  230.38,55.12 0 top
U$8  [STAND-OFF]  230.38,22.1 0 top
U$9  [STAND-OFF]  183.39,55.12 0 top
U$10  [STAND-OFF]  170.69,22.1 0 top
U$11  [FLANGED_RED_ENCLOSURE-DIMENSION-NO-INNER-HOLES]  6.86,89.15 0 top
U$12  [STAND-OFF]  75.44,137.41 0 top
U$13  [STAND-OFF]  75.44,104.39 0 top
U$14  [STAND-OFF]  28.45,137.41 0 top
U$15  [STAND-OFF]  15.75,104.39 0 top
U$16  [FLANGED_RED_ENCLOSURE-DIMENSION-NO-INNER-HOLES]  161.8,89.15 0 top
U$17  [STAND-OFF]  230.38,137.41 0 top
U$18  [STAND-OFF]  230.38,104.39 0 top
U$19  [STAND-OFF]  183.39,137.41 0 top
U$20  [STAND-OFF]  170.69,104.39 0 top
VIN  3.5mm  [SCREWTERMINAL-3.5MM-2_LOCK]  153.36,66.86 90 top
VIN1  3.5mm  [SCREWTERMINAL-3.5MM-2_LOCK]  308.3,66.86 90 top
VIN2  3.5mm  [SCREWTERMINAL-3.5MM-2_LOCK]  153.36,149.15 90 top
VIN3  3.5mm  [SCREWTERMINAL-3.5MM-2_LOCK]  308.3,149.15 90 top
X-A  3.5mm  [SCREWTERMINAL-3.5MM-2_LOCK]  33.86,18.36 0 top
X-A1  3.5mm  [SCREWTERMINAL-3.5MM-2_LOCK]  188.8,18.36 0 top
X-A2  3.5mm  [SCREWTERMINAL-3.5MM-2_LOCK]  33.86,100.65 0 top
X-A3  3.5mm  [SCREWTERMINAL-3.5MM-2_LOCK]  188.8,100.65 0 top
X-B  3.5mm  [SCREWTERMINAL-3.5MM-2_LOCK]  26.86,18.36 0 top
X-B1  3.5mm  [SCREWTERMINAL-3.5MM-2_LOCK]  181.8,18.36 0 top
X-B2  3.5mm  [SCREWTERMINAL-3.5MM-2_LOCK]  26.86,100.65 0 top
X-B3  3.5mm  [SCREWTERMINAL-3.5MM-2_LOCK]  181.8,100.65 0 top
Y-A  3.5mm  [SCREWTERMINAL-3.5MM-2_LOCK]  47.86,18.36 0 top
Y-A1  3.5mm  [SCREWTERMINAL-3.5MM-2_LOCK]  202.8,18.36 0 top
Y-A2  3.5mm  [SCREWTERMINAL-3.5MM-2_LOCK]  47.86,100.65 0 top
Y-A3  3.5mm  [SCREWTERMINAL-3.5MM-2_LOCK]  202.8,100.65 0 top
Y-B  3.5mm  [SCREWTERMINAL-3.5MM-2_LOCK]  40.86,18.36 0 top
Y-B1  3.5mm  [SCREWTERMINAL-3.5MM-2_LOCK]  195.8,18.36 0 top
Y-B2  3.5mm  [SCREWTERMINAL-3.5MM-2_LOCK]  40.86,100.65 0 top
Y-B3  3.5mm  [SCREWTERMINAL-3.5MM-2_LOCK]  195.8,100.65 0 top
Z-A  3.5mm  [SCREWTERMINAL-3.5MM-2_LOCK]  61.86,18.36 0 top
Z-A1  3.5mm  [SCREWTERMINAL-3.5MM-2_LOCK]  216.8,18.36 0 top
Z-A2  3.5mm  [SCREWTERMINAL-3.5MM-2_LOCK]  61.86,100.65 0 top
Z-A3  3.5mm  [SCREWTERMINAL-3.5MM-2_LOCK]  216.8,100.65 0 top
Z-B  3.5mm  [SCREWTERMINAL-3.5MM-2_LOCK]  54.86,18.36 0 top
Z-B1  3.5mm  [SCREWTERMINAL-3.5MM-2_LOCK]  209.8,18.36 0 top
Z-B2  3.5mm  [SCREWTERMINAL-3.5MM-2_LOCK]  54.86,100.65 0 top
Z-B3  3.5mm  [SCREWTERMINAL-3.5MM-2_LOCK]  209.8,100.65 0 top

## Library data of the parts
C1 C6 C8 C16-C18 C27-C29 C48 C49 C59 C83-C85 C94-C96 C113-C115 C139-C141 C150-C152 C169-C171 C195-C197 C206-C208 = SparkFun-Capacitors; PROD_ID: CAP-09885
C2 C78 C134 C190 = SparkFun-Capacitors; PROD_ID: CAP-08390
C3 C5 C7 C10 C11 C19 C20 C24 C30 C31 C37 C43-C47 C50-C58 C60 C61 C66-C77 C80 C86 C87 C92 C97 C98 C103 C109-C112 C116 C117 C122-C133 C136 C142 C143 C148 C153 C154 C159 C165-C168 C172 C173 C178-C189 C192 C198 C199 C204 C209 C210 C215 C221-C224 = SparkFun-Capacitors; PROD_ID: CAP-00810
C4 C42 C79 C108 C135 C164 C191 C220 = SparkFun-Capacitors; PROD_ID: CAP-09822
C9 C81 C137 C193 = SparkFun-Capacitors; PROD_ID: CAP-00867
C12 C13 C21 C22 C33 C34 C62 C63 C88 C89 C99 C100 C118 C119 C144 C145 C155 C156 C174 C175 C200 C201 C211 C212 = SparkFun-Capacitors; PROD_ID: CAP-07886
C14 C23 C25 C26 C35 C38 C40 C41 C64 C82 C90 C93 C101 C104 C106 C107 C120 C138 C146 C149 C157 C160 C162 C163 C176 C194 C202 C205 C213 C216 C218 C219 = SparkFun-Capacitors; PROD_ID: CAP-10547
C15 C32 C36 C65 C91 C102 C121 C147 C158 C177 C203 C214 = SparkFun-Capacitors; PROD_ID: CAP-12380
C39 C105 C161 C217 = SparkFun-Capacitors; PROD_ID: CAP-10381
D1 D3 D5 D7 D9 D13 D19 D22 D25 D28 D30 D33 D37 D40 D43 D46 D48 D51 D55 D58 D61 D64 D66 D69 = SparkFun-LED; PROD_ID: DIO-09912
D2 D4 D8 D12 D15 D20 D21 D24 D27 D32 D38 D39 D42 D45 D50 D56 D57 D60 D63 D68 = SparkFun-LED; PROD_ID: DIO-09910
D6 D10 D14 D23 D26 D29 D41 D44 D47 D59 D62 D65 = SparkFun-LED; PROD_ID: DIO-09909
D11 D18 D31 D35 D49 D53 D67 D71 = SparkFun-LED; PROD_ID: DIO-09911
D16 D17 D34 D36 D52 D54 D70 D72 = SparkFun-DiscreteSemi; PROD_ID: DIO-08053
E$1 = SparkFun-Retired
E$4 E$5 FID1-FID8 LOGO1-LOGO12 = SparkFun-Aesthetics
F1-F4 = SparkFun-PowerIC; PROD_ID: RES-11150
J1-J4 JP2 JP18-JP20 JP29 JP30 JP39 JP40 = SparkFun-Connectors
JP1 JP3 JP4 JP8 JP9 JP11-JP17 JP23-JP28 JP33-JP38 VIN VIN1-VIN3 X-A X-A1-X-A3 X-B X-B1-X-B3 Y-A Y-A1-Y-A3 Y-B Y-B1-Y-B3 Z-A Z-A1-Z-A3 Z-B Z-B1-Z-B3 = SparkFun-Connectors; PROD_ID: CONN-08399
JP5 JP7 JP21 JP31 = SparkFun-Connectors; PROD_ID: CONN-08278
JP6 JP10 JP22 JP32 = SparkFun-Connectors; PROD_ID: CONN-08197; SF_ID: PRT-00119
L1-L4 = SparkFun-Passives; PROD_ID: NDUC-12529
POT1-POT12 = SparkFun-Resistors; PROD_ID: RES-12428
Q1 Q3 Q5 Q7 = SparkFun-FreqCtrl; PROD_ID: XTAL-08900
Q2 Q4 Q6 Q8 = SparkFun-DiscreteSemi; PROD_ID: TRANS-12437
R1 R17 R26 R66 R102 R110 R124 R160 R168 R182 R218 R226 = SparkFun-Resistors; PROD_ID: RES-08609
R2 R3 R10 R11 R19 R20 R59 R60 R95 R96 R103 R104 R117 R118 R153 R154 R161 R162 R175 R176 R211 R212 R219 R220 = SparkFun-Resistors; PROD_ID: RES-12374
R4 R5 R12 R13 R21 R22 R61 R62 R97 R98 R105 R106 R119 R120 R155 R156 R163 R164 R177 R178 R213 R214 R221 R222 = SparkFun-Resistors; PROD_ID: RES-12377
R6 R27-R29 R35 R38 R51 R52 R56 R67 R70-R72 R76 R78 R93 R94 R114 R125 R128-R130 R134 R136 R151 R152 R172 R183 R186-R188 R192 R194 R209 R210 R230 = SparkFun-Resistors; PROD_ID: RES-00824
R7 R8 R14 R15 R23 R24 R63 R64 R99 R100 R107 R108 R121 R122 R157 R158 R165 R166 R179 R180 R215 R216 R223 R224 = SparkFun-Resistors; PROD_ID: RES-12378
R9 R18 R30-R34 R36 R39-R50 R57 R58 R68 R69 R73-R75 R77 R79-R92 R115 R116 R126 R127 R131-R133 R135 R137-R150 R173 R174 R184 R185 R189-R191 R193 R195-R208 R231 R232 = SparkFun-Resistors; PROD_ID: RES-07856
R16 R25 R37 R65 R101 R109 R123 R159 R167 R181 R217 R225 = SparkFun-Resistors; PROD_ID: RES-07851
R53 R111 R169 R227 = SparkFun-Resistors; PROD_ID: RES-12534
R54 R112 R170 R228 = SparkFun-Resistors; PROD_ID: RES-12535
R55 R113 R171 R229 = SparkFun-Resistors; PROD_ID: RES-12533
S1-S3 S7-S9 S12-S14 S17-S19 = SparkFun-Electromechanical; PROD_ID: SWCH-12532
S4 S6 S11 S16 = SparkFun-Electromechanical; PROD_ID: SWCH-08247
S5 S10 S15 S20 = SparkFun-Electromechanical; PROD_ID: SWCH-08179
U1 U11 U21 U31 = SparkFun-DigitalIC; PROD_ID: IC-09069
U2 U12 U22 U32 = SparkFun-DigitalIC; PROD_ID: IC-00870
U3 U20 U30 U40 = SparkFun-DigitalIC; PROD_ID: IC-10843
U4 U15 U25 U35 = SparkFun-PowerIC; PROD_ID: IC-12528
U5 U8 U9 U16-U18 U26-U28 U36-U38 = SparkFun-PowerIC; PROD_ID: IC-12375
U6 U14 U24 U34 = SparkFun-DigitalIC; PROD_ID: IC-12527
U7 U13 U23 U33 = SparkFun-DigitalIC; PROD_ID: IC-10842
U10 U19 U29 U39 = SparkFun-PowerIC; PROD_ID: VREG-12370
U$1 U$6 U$11 U$16 = SparkFun-Boards
U$2-U$5 U$7-U$10 U$12-U$15 U$17-U$20 = SparkFun-Electromechanical